# Altium PCB mach_in.PcbDoc
Units mm, origin at the board's own origin, x right, y up, seen from the top; angles counter-clockwise.
Board outline 152.4 x 101.6 mm, 2 copper layers (Top Layer, Bottom Layer); 16 components, 15 nets, 50 pads, 0 vias.
Unrouted connection lines stored in the file: 35.
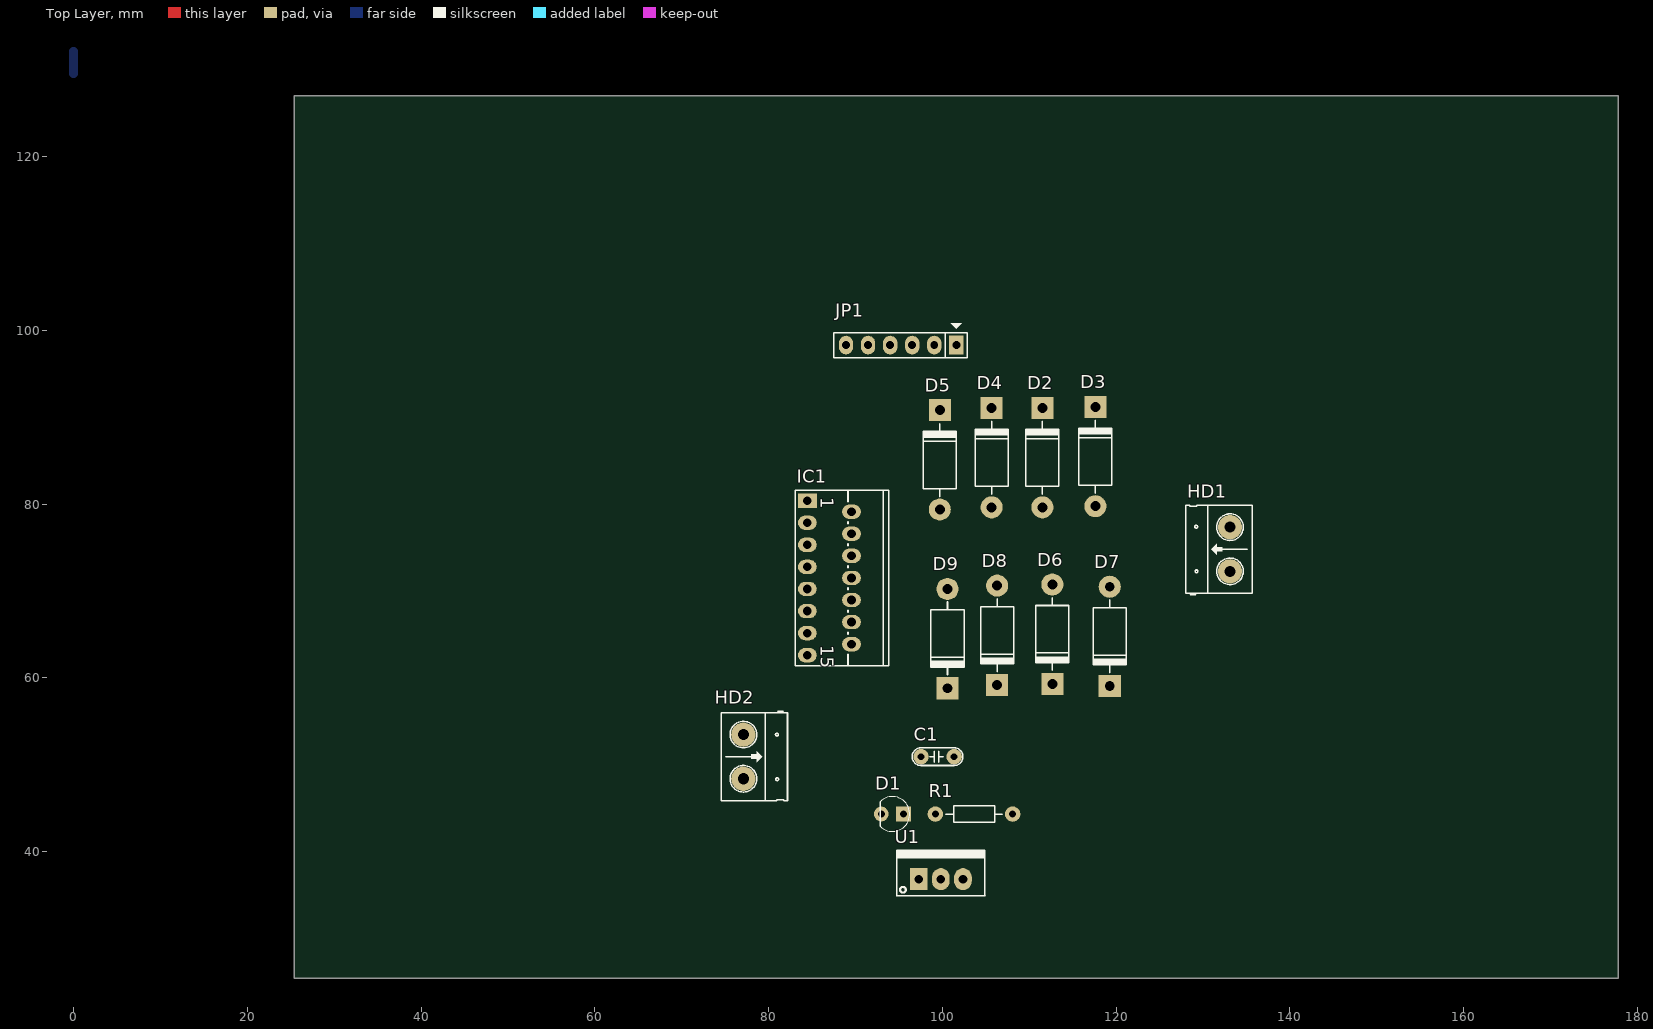
[diagram p0: Top Layer view]
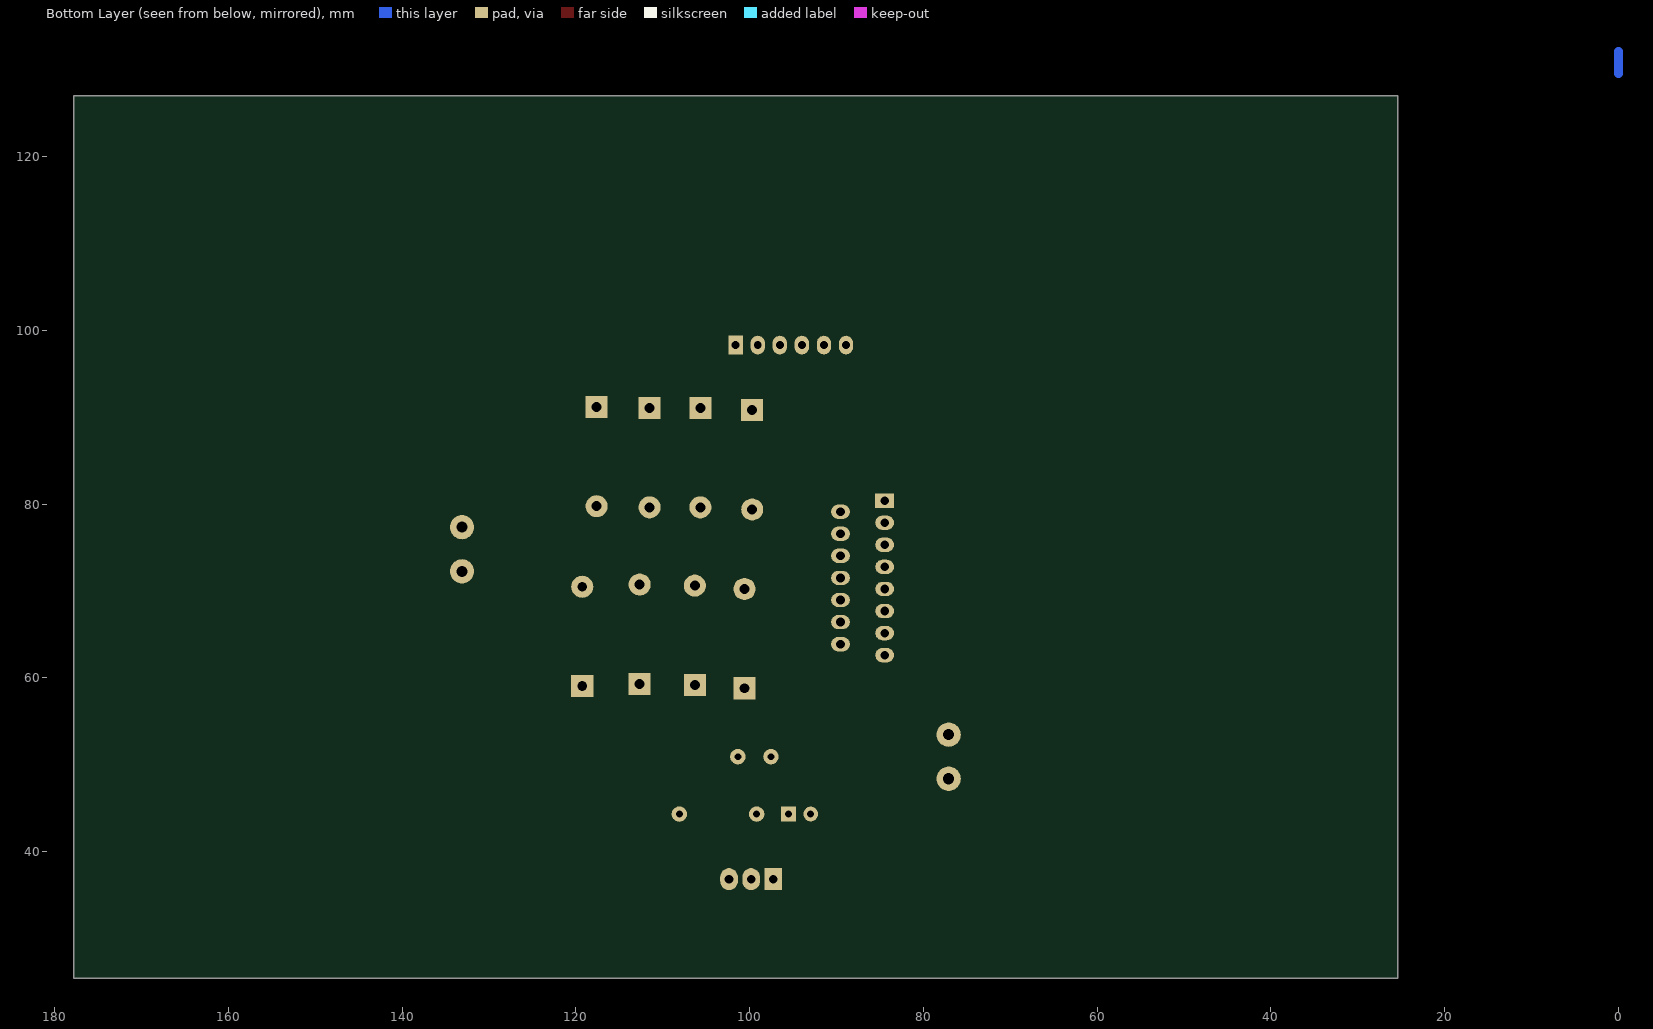
[diagram p1: Bottom Layer view, seen from below]

## Layer stack, top to bottom
Top Solder: solder mask 0.0102, Solder Resist, Dk 3.5
Top Layer: signal copper 0.0356
Dielectric 1: dielectric 0.32, FR-4, Dk 4.8
Bottom Layer: signal copper 0.0356
Bottom Solder: solder mask 0.0102, Solder Resist, Dk 3.5

## Board outline
25.4,25.4 177.8,25.4 177.8,127 25.4,127

## Design rules (kind name [scope] priority, off if disabled: settings)
Clearance [All] p1: gap=0.254
PlaneConnect [All] p1: planeconnectstyle=Relief reliefexpansion=0.508 reliefentries=4 reliefconductorwidth=0.254 reliefairgap=0.5
PolygonConnect [All] p1: connectstyle=Relief reliefconductorwidth=0.254 reliefentries=2 polygonreliefangle="45 Angle" airgapwidth=0.254
RoutingVias [All] p1: holewidth=0.711 width=1.27 viastyle="Through Hole" minholewidth=0.711 minwidth=1.27 maxholewidth=0.711 maxwidth=1.27
SolderMaskExpansion [All] p1: expansion=0.102
Width [All] p1: maxlimit=3 minlimit=0.5 preferedwidth=1
29 further rules are at their usual default settings.

## Components (designator, comment, footprint, x,y, rotation, side; value= is the part's Value field where it differs from the comment)
C1 "220uF" CN1.5 99.314,50.927 r0 top
D1 "LED" "LED-0 3mm RED" 94.234,44.323 r270 top
D2 "1N4007" D2A 111.506,91.059 r270 top
D3 "1N4007" D2A 117.602,91.186 r270 top
D4 "1N4007" D2A 105.664,91.059 r270 top
D5 "1N4007" D2A 99.695,90.805 r270 top
D6 "1N4007" D2A 112.649,59.309 r90 top
D7 "1N4007" D2A 119.253,59.055 r90 top
D8 "1N4007" D2A 106.299,59.182 r90 top
D9 "1N4007" D2A 100.584,58.801 r90 top
HD1 "out12" HED2 133.096,72.263 r90 top
HD2 "out34" HED2 77.089,53.467 r270 top
IC1 "L298" DIP15SL2 86.995,71.501 r270 top
JP1 "JP6 PIN" JP6 101.6,98.298 r180 top
R1 "220" R1/4W 99.187,44.323 r0 top
U1 "LM78xx" TO-220 97.282,36.83 r0 top

## Footprints (in the part's own frame and the unit in brackets; to place one, negate y for a bottom-side part, rotate by r counter-clockwise, add the part's x,y. Pads: shape width x height; smd on the part's side, far side on the other; paste and mask are expansions set on the pad)
CN1.5 [mil]
  round 70 hole 31: 1(-70,0) 2(80,0)
  silkscreen extent -110,-40 120,40, body extent -110,-33 120,33, height 235
D2A [mil] "Diode 2A, W 150mil, L 450mil"
  round 100 hole 45: 1(450,0)
  rect 100x100 hole 45: 2(0,0)
  silkscreen extent 61,-75 391,75, body extent 5,-47 435,54, height 100
DIP15SL2 [mil]
  rect 65x85 hole 39.37: 1(-350,-100)
  oval 65x85 hole 39.37: 2(-300,100) 3(-250,-100) 4(-200,100) 5(-150,-100) 6(-100,100) 7(-50,-100) 8(0,100) 9(50,-100) 10(100,100) 11(150,-100) 12(200,100) 13(250,-100) 14(300,100) 15(350,-100)
  silkscreen extent -398,-155 398,269, body extent -382,-110 390,247, height 895
HED2 [mil] "Header 2, 2 pin, hight 300mil, Pin to Pin 200, Colour Green"
  round 110 hole 50: 1(0,0) 2(200,0)
  silkscreen extent -106,-100 300,200, body extent -92,-140 302,155, height 394
JP6 [mil] "JP6"
  rect 65x85 hole 36: 1(0,0)
  oval 65x85 hole 36: 2(100,0) 3(200,0) 4(300,0) 5(400,0) 6(500,0)
  silkscreen extent -50,-99 556,58, body extent -48,-50 548,48, height 323
"LED-0 3mm RED" [mil] "Typical LED; RED; 2 Leads; Solder Pad 35mil"
  rect 67x67 hole 32: 1(0,50)
  round 67 hole 32: 2(0,-50)
  silkscreen extent -79,-56 79,79, body extent -64,-66 66,64, height 207
R1/4W [mil] "R 1/4W, 2 Pin, 350mil"
  round 70 hole 31: 1(0,0) 2(350,0)
  silkscreen extent 48,-38 302,38, body extent -40,-47 386,47, height 111
TO-220 [mil] "TO-220 - 1-2-3"
  rect 80x100 hole 39: 1(0,0)
  oval 80x100 hole 39: 2(100,0) 3(200,0)
  silkscreen extent -100,-76 300,130, body extent -119,-64 322,121, height 755

## Part data
C1: library part CN1.5, "Cap np 682pF => 104pF"
D1: "Typical LED"
D2 D3 D4 D5 D6 D7 D8 D9: library part D1A, "Diode 1A"
HD1 HD2: library part Hed2, "Header 2 (Green)"
IC1: "Dual Full-H Driver"
JP1: library part JP6
R1: library part R1/4W, "Resistor 1/4W"
U1: "Regulator"

## Nets (pads, with @x,y where several pads share a name; then routed paths per layer and width w, separated by ;. In a path a pad name is that pad's centre, name@x,y a point inside that pad or via, vN(x,y) a via of type N, cw(c..) or ccw(c..) an arc to the next point about the centre after c; other vN are vias at no path point)
GND: D6.2 D7.2 D8.2 D9.2 IC1.1 IC1.8 IC1.15 U1.2
NetC1_1: C1.1 D1.2 D2.2 D3.2 D4.2 D5.2 IC1.9
NetC1_2: C1.2 R1.2 U1.3
NetD1_1: D1.1 R1.1
NetD2_1: D2.1 D6.1 HD1.1 IC1.2
NetD3_1: D3.1 D7.1 HD1.2 IC1.3
NetD4_1: D4.1 D8.1 HD2.1 IC1.13
NetD5_1: D5.1 D9.1 HD2.2 IC1.14
NetIC1_4: IC1.4 U1.1
NetIC1_5: IC1.5 JP1.5
NetIC1_6: IC1.6 JP1.6
NetIC1_7: IC1.7 JP1.4
NetIC1_10: IC1.10 JP1.2
NetIC1_11: IC1.11 JP1.3
NetIC1_12: IC1.12 JP1.1
copper on no net: | length 3.3
  Bottom Layer w1: 0,130.302 0,129.54 0,132.08

## Text inside footprints (layer, text, board x,y; h text height)
IC1: Top Overlay "15" at 85.979,63.754 h1.5 r270; Top Overlay "1" at 85.979,80.772 h1.5 r270